# EAGLE board arduino_2009 (EAGLE 7.1.0)
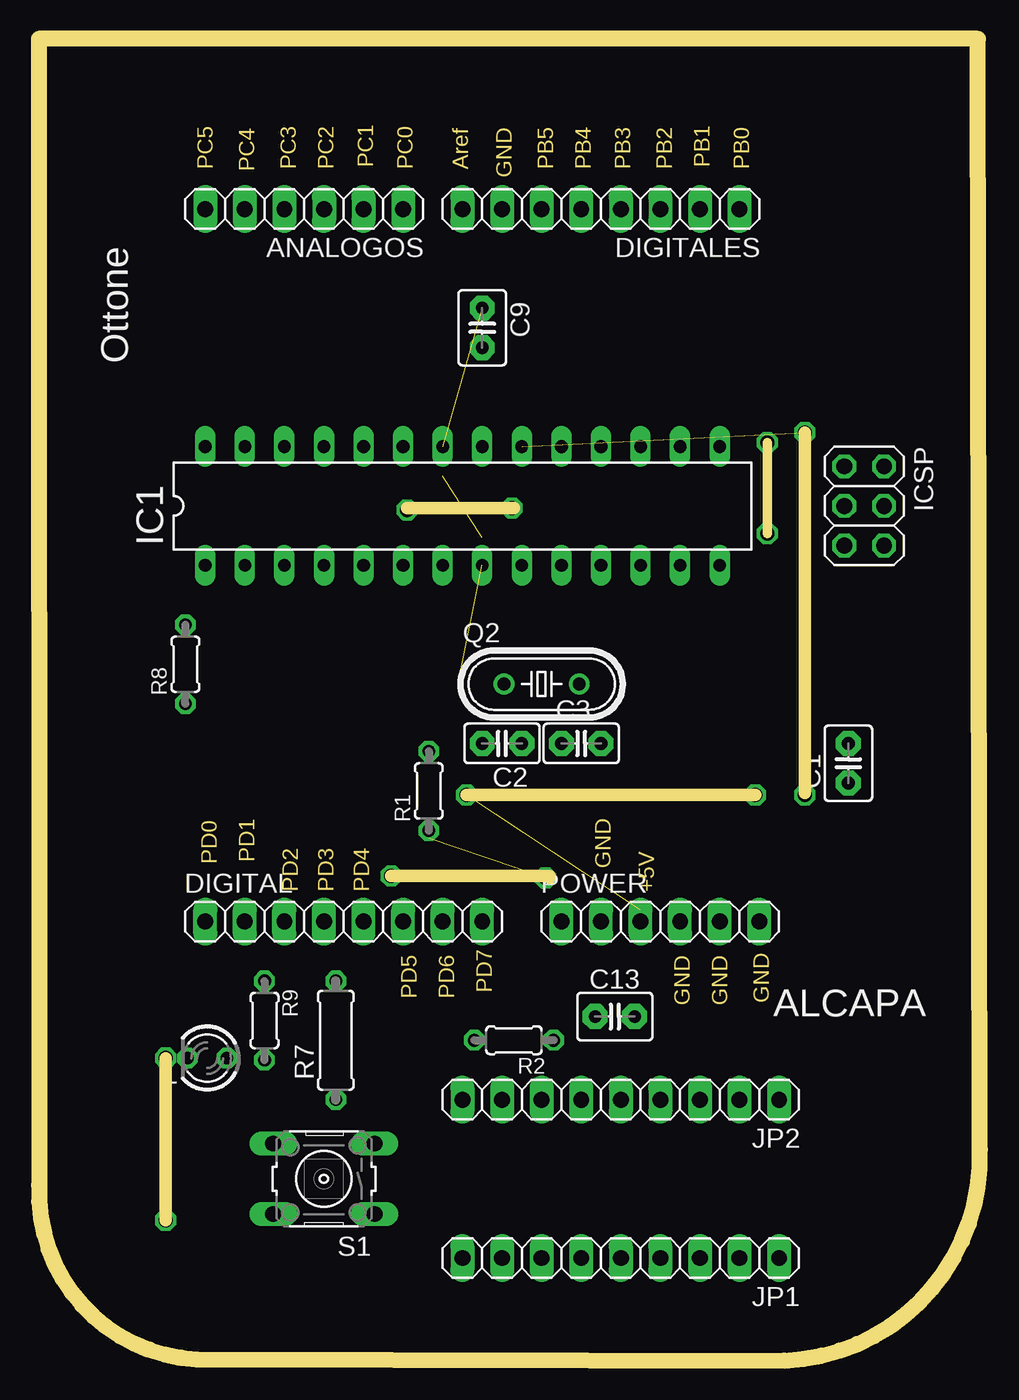
[diagram p0: board, top side]
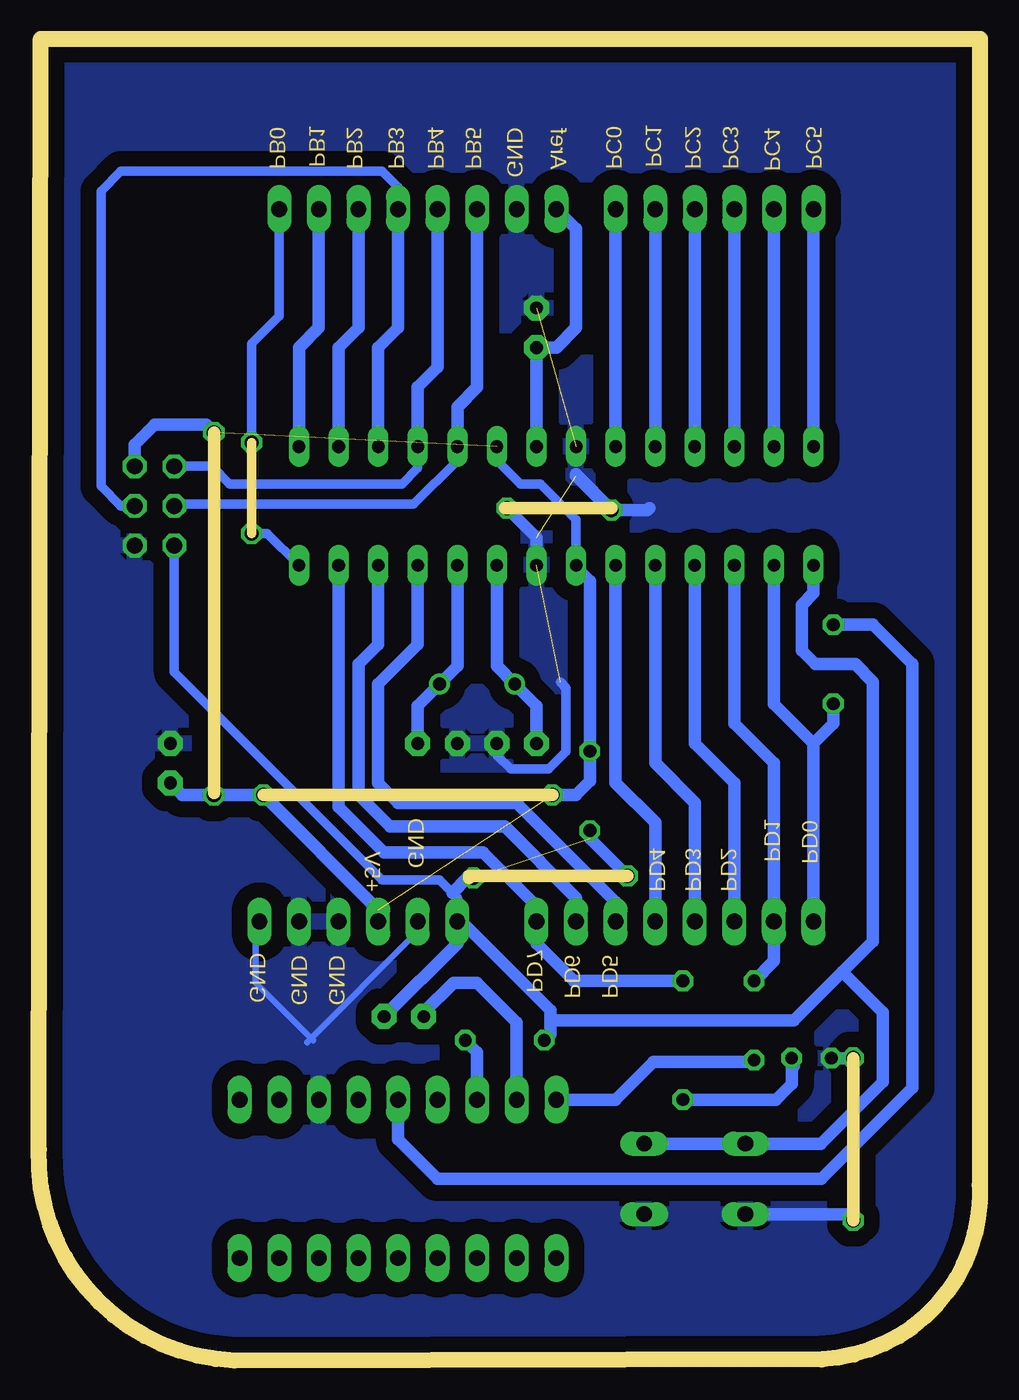
[diagram p1: board, bottom side, seen from below]

Size 60.38 x 84.8 mm. Coordinates in mm from the lower left corner, seen from the top.
Outline: 46.74,58.9 46.74,53.06
Outline: 22.61,31.09 32.77,31.09 32.77,30.96
Outline: 27.43,36.3 45.97,36.3
Outline: 23.62,54.71 30.48,54.71
Outline: 49.15,36.42 49.15,59.54
Outline: 8.13,19.4 8.13,8.99
Outline: 0,84.8 0.02,11.26 arc90 10.14,0.08 47.82,0 arc90 60.38,13.54 60.25,84.8 0,84.8
Copper layers (1*16): Top 0.035mm / dielectric 1.5mm / Bottom 0.035mm
Design rules "default *": minimum track width 10mil, minimum drill 24mil, track to track 40mil, track to pad 40mil, pad to pad 8mil, via to via 8mil, smd to smd 8mil, copper to edge 40mil, drill to drill 8mil, minimum pad ring 10mil, minimum via ring 8mil, stop-mask expansion 4mil, vias tented up to drill 0mil, thermal gap 10mil
Net classes: 0 default: width 0.254 mm, drill 0.305 mm, clearance 0.152 mm; 1 power: width 0.61 mm, drill 0.508 mm, clearance 0.152 mm; 2 gnd: width 0.305 mm, drill 0.508 mm, clearance 0.152 mm; 3 usbvcc: width 0.508 mm, drill 0.508 mm, clearance 0.152 mm; 4 aref: width 0.406 mm

## Footprints (pad centres in the part's own frame; a part is rotated, then mirrored left to right if it is on the bottom)
1X06 = drill 1.016 long: 1 -6.35,0; 2 -3.81,0; 3 -1.27,0; 4 1.27,0; 5 3.81,0; 6 6.35,0
C2.5-3 = drill 0.813 pad 1.6 octagon: 1 -1.27,0; 2 1.27,0
C2.5-2 = drill 0.813 pad 1.6 octagon: 1 -1.27,0; 2 1.27,0
1X08 = drill 1.016 long: 1 -8.89,0; 2 -6.35,0; 3 -3.81,0; 4 -1.27,0; 5 1.27,0; 6 3.81,0; 7 6.35,0; 8 8.89,0
DIL28-3 = drill 0.813 long: 1 -16.51,-3.81; 2 -13.97,-3.81; 3 -11.43,-3.81; 4 -8.89,-3.81; 5 -6.35,-3.81; 6 -3.81,-3.81; 7 -1.27,-3.81; 8 1.27,-3.81; 9 3.81,-3.81; 10 6.35,-3.81; 11 8.89,-3.81; 12 11.43,-3.81; 13 13.97,-3.81; 14 16.51,-3.81; 15 16.51,3.81; 16 13.97,3.81; 17 11.43,3.81; 18 8.89,3.81; 19 6.35,3.81; 20 3.81,3.81; 21 1.27,3.81; 22 -1.27,3.81; 23 -3.81,3.81; 24 -6.35,3.81; 25 -8.89,3.81; 26 -11.43,3.81; 27 -13.97,3.81; 28 -16.51,3.81
2X03 = drill 1.016 octagon: 1 -2.54,-1.27; 2 -2.54,1.27; 3 0,-1.27; 4 0,1.27; 5 2.54,-1.27; 6 2.54,1.27
1X09 = drill 1.016 long: 1 -10.16,0; 2 -7.62,0; 3 -5.08,0; 4 -2.54,0; 5 0,0; 6 2.54,0; 7 5.08,0; 8 7.62,0; 9 10.16,0
LED3MM = drill 0.813 octagon: A -1.27,0; K 1.27,0
HC49/S = drill 0.813: 1 -2.413,0; 2 2.413,0
0204/5 = drill 0.813 octagon: 1 -2.54,0; 2 2.54,0
0207/7 = drill 0.813 octagon: 1 -3.81,0; 2 3.81,0
B3F-10XX = drill 1.016 long: 1 -3.251,2.261; 2 3.251,2.261; 3 -3.251,-2.261; 4 3.251,-2.261

## Placement (x,y rotation side)
ANALOGOS  [1X06]  17.02,73.89 180 top
C1  100n  [C2.5-3]  51.94,38.33 90 top
C2  22p  [C2.5-2]  29.72,39.6 180 top
C3  22p  [C2.5-2]  34.8,39.6 0 top
C9  100n  [C2.5-3]  28.45,66.27 270 top
C13  100n  [C2.5-3]  36.96,22.07 0 top
DIGITAL  [1X08]  19.56,28.17 0 top
DIGITALES  [1X08]  36.07,73.89 180 top
IC1  ATMEGA8  [DIL28-3]  27.18,54.84 0 top
ICSP  ICSP  [2X03]  52.96,54.84 270 top
JP1  [1X09]  37.34,6.58 180 top
JP2  [1X09]  37.34,16.74 180 top
L  [LED3MM]  10.79,19.4 180 top
POWER  [1X06]  39.88,28.17 0 top
Q2  16MHz  [HC49/S]  32.26,43.41 0 top
R1  10k  [0204/5]  25.02,36.55 90 top
R2  100_NM  [0204/5]  30.48,20.55 180 top
R7  1k  [0207/7]  19.05,20.55 90 top
R8  1k  [0204/5]  9.4,44.68 90 top
R9  1k  [0204/5]  14.48,21.82 270 top
S1  [B3F-10XX]  18.29,11.66 180 top

## Library data of the parts
ANALOGOS DIGITAL DIGITALES ICSP JP1 JP2 POWER = pinhead
C1-C3 C9 C13 = capacitor-wima
IC1 = atmel
L = led
Q2 = crystal
R1 R2 R7-R9 = resistor
S1 = switch-omron

## Nets
+5V [usbvcc]: C1.1 IC1.7 IC1.20 ICSP.2 POWER.3 R1.2
AREF [aref]: C9.2 DIGITALES.8 IC1.21
DTR: C13.1 JP2.8
GND [gnd]: C1.2 C2.1 C3.1 C9.1 DIGITALES.7 IC1.8 IC1.22 ICSP.6 JP2.3 L.K POWER.4 POWER.5 S1.1 S1.2
M8RXD: JP2.5 R8.2
M8TXD: JP2.9 R9.2
MISO: DIGITALES.5 IC1.18 ICSP.1
MOSI: DIGITALES.4 IC1.17 ICSP.4
N$2: L.A R7.1
N$5: DIGITALES.1 IC1.14
N$6: C2.2 IC1.9 Q2.1
N$7: C3.2 IC1.10 Q2.2
N$10: DIGITAL.3 IC1.4
N$11: DIGITAL.4 IC1.5
N$12: DIGITAL.5 IC1.6
N$13: DIGITAL.6 IC1.11
N$14: DIGITAL.7 IC1.12
N$15: DIGITAL.8 IC1.13 R7.2
N$16: ANALOGOS.1 IC1.23
N$17: ANALOGOS.2 IC1.24
N$18: ANALOGOS.3 IC1.25
N$19: ANALOGOS.4 IC1.26
N$20: ANALOGOS.5 IC1.27
N$21: ANALOGOS.6 IC1.28
N$22: DIGITALES.2 IC1.15
PD0: DIGITAL.1 IC1.2 R8.1
PD1: DIGITAL.2 IC1.3 R9.1
RESET: C13.2 IC1.1 ICSP.5 POWER.1 R1.1 R2.2 S1.3 S1.4
RTS: JP2.7 R2.1
SCK: DIGITALES.6 IC1.19 ICSP.3
SS: DIGITALES.3 IC1.16

## Tracks (layer width: path | path; a pad name or v marks a point on that pad's centre or on a via)
+5V  (via drill 0.9 pad 1.27)  (2 unrouted)
  Bottom 0.61: IC1.20 30.99,57.76 29.46,56.23 28.19,56.23 25.91,53.95 IC1.7
  Bottom 0.813: IC1.7 25.91,50.9 25.02,50.01 R1.2 25.02,37.18 25.91,36.3 v27.43,36.3 | POWER.3 38.61,28.93 v45.97,36.3 v49.15,36.3 51.18,36.3 C1.1 | ICSP.2 54.23,58.77 52.96,60.04 49.66,60.04 v49.15,59.54
AREF
  Bottom 0.813: IC1.21 C9.2 27.18,65 25.91,66.27 25.91,72.62 DIGITALES.8
DTR
  Bottom 0.813: C13.1 35.69,22.33 33.78,24.23 32.26,24.23 29.72,21.69 JP2.8
GND  (via drill 0.9 pad 1.27)  (4 unrouted)
  Bottom 0.406: 46.48,27.66 46.48,24.23 42.8,20.55 | 36.2,28.42 36.2,27.41 43.18,20.42
  Bottom 0.61: C2.1 30.99,38.84 30.1,37.95 27.69,37.95 26.54,39.09 26.54,43.15 26.92,43.53
  Bottom 0.813: IC1.8 28.45,52.81 v30.35,54.71 | v23.62,54.58 25.91,56.87 25.91,56.74 23.75,54.58 21.34,54.58 21.21,54.71 | L.K 8.13,19.4 | S1.2 8.41,9.4 8,8.99
  pour Bottom: -30.23,93.57 120.01,90.52 120.52,-0.28 -28.58,-3.58
M8RXD
  Bottom 0.813: R8.2 6.86,47.22 4.32,44.68 4.32,17.5 10.16,11.66 34.8,11.66 37.34,14.2 JP2.5
M8TXD
  Bottom 0.813: JP2.9 23.37,16.74 20.95,19.15 14.6,19.15 R9.2
MISO
  Bottom 0.61: IC1.18 36.07,57.25 37.08,56.23 48.13,56.23 49.28,57.38 ICSP.1
  Bottom 0.813: IC1.18 36.07,62.46 34.8,63.73 DIGITALES.5
MOSI
  Bottom 0.61: ICSP.4 55.12,54.84 56.39,56.11 56.39,75.03 55.12,76.3 38.35,76.3 37.34,75.28 DIGITALES.4
  Bottom 0.813: IC1.17 38.61,65 37.34,66.27 DIGITALES.4
N$1  (via drill 0.9 pad 1.27)
  other vias: 8.13,19.4
N$2
  Bottom 0.813: R7.1 13.08,16.74 12.06,17.75 12.06,18.77 11.94,18.9 11.94,19.28 L.A
N$3  (via drill 0.9 pad 1.27)
  other vias: 8.13,8.99
N$5  (via drill 0.9 pad 1.27)  (1 unrouted)
  Bottom 0.61: v46.74,58.9 46.74,65.25 44.96,67.03 DIGITALES.1 | v46.74,53.06 45.72,53.06 IC1.14
N$6
  Bottom 0.813: IC1.9 30.99,44.55 Q2.1 28.45,42.01 C2.2
N$7
  Bottom 0.813: IC1.10 33.53,44.55 Q2.2 36.07,42.01 C3.2
N$10
  Bottom 0.813: DIGITAL.3 15.75,37.06 18.29,39.6 IC1.4
N$11
  Bottom 0.813: DIGITAL.4 18.29,35.79 20.83,38.33 IC1.5
N$12
  Bottom 0.813: DIGITAL.5 20.83,34.52 23.37,37.06 IC1.6
N$13
  Bottom 0.813: IC1.11 36.07,45.95 38.61,43.41 38.61,37.06 37.34,35.79 29.72,35.79 23.37,29.44 DIGITAL.6
N$14
  Bottom 0.813: IC1.12 38.61,45.95 39.88,44.68 39.88,36.3 37.85,34.26 30.48,34.26 25.91,29.69 DIGITAL.7
N$15
  Bottom 0.813: IC1.13 41.15,35.53 38.23,32.61 31.88,32.61 28.45,29.18 DIGITAL.8 28.45,26.77 26.04,24.36 R7.2
N$16
  Bottom 0.813: ANALOGOS.1 IC1.23
N$17
  Bottom 0.813: IC1.24 ANALOGOS.2
N$18
  Bottom 0.813: ANALOGOS.3 IC1.25
N$19
  Bottom 0.813: IC1.26 ANALOGOS.4
N$20
  Bottom 0.813: ANALOGOS.5 IC1.27
N$21
  Bottom 0.813: IC1.28 ANALOGOS.6
N$22
  Bottom 0.813: IC1.15 43.69,65 42.42,66.27 DIGITALES.2
PD0
  Bottom 0.813: IC1.2 13.21,42.14 10.67,39.6 | 10.67,39.6 DIGITAL.1 | R8.1 9.4,40.87 10.67,39.6
PD1
  Bottom 0.813: IC1.3 15.75,40.87 13.21,38.33 DIGITAL.2 13.21,25.63 R9.1
RESET  (via drill 0.9 pad 1.27)  (1 unrouted)
  Bottom 0.61: POWER.1 33.53,29.69 33.85,30.01 34.67,30.83 38.35,30.83 51.69,44.17 ICSP.5
  Bottom 0.813: IC1.1 10.67,49.25 11.43,48.49 11.43,45.57 10.54,44.68 8,44.68 6.86,43.53 6.86,26.9 8.83,24.93 | 8.83,24.93 11.94,21.82 27.56,21.82 | S1.3 S1.4 10.18,13.92 6.22,17.88 6.22,22.33 8.83,24.93 | C13.2 33.53,26.77 POWER.1 33.27,28.17 27.56,22.45 27.56,21.82 | R1.1 25.02,33.5 v22.61,31.09 | v32.51,30.96 32.89,30.96 33.85,30.01 | 27.56,21.82 27.56,20.93 R2.2
RTS
  Bottom 0.813: JP2.7 32.26,19.79 R2.1
SCK
  Bottom 0.61: IC1.19 33.53,57.76 36.32,54.96 51.18,54.96 ICSP.3
  Bottom 0.813: IC1.19 33.53,61.19 32.26,62.46 DIGITALES.6
SS
  Bottom 0.813: IC1.16 41.15,65 39.88,66.27 DIGITALES.3

## Text on the board
Dimension: PC1 | PB1 | PC5 | PC4 | PC3 | PC2 | PC0 | Aref | GND | PB5 | PB4 | PB3 | PB2 | PB0 | PD0 | PD1 | GND | PD2 | PD3 | PD4 | +5V | GND | GND | PD7 | PD5 | PD6 | GND
tNames: Ottone | ALCAPA